# Altium PCB PCB_REG.PcbDoc
Units mil, origin at the board's own origin, x right, y up, seen from the top; angles counter-clockwise.
Board outline 3440 x 3440 mil, 4 copper layers (Top Signal, PWR, GND, Bottom Signal), stack 23.756 mil thick; 57 components, 44 nets, 300 pads, 49 vias.
Unrouted connection lines stored in the file: 28.
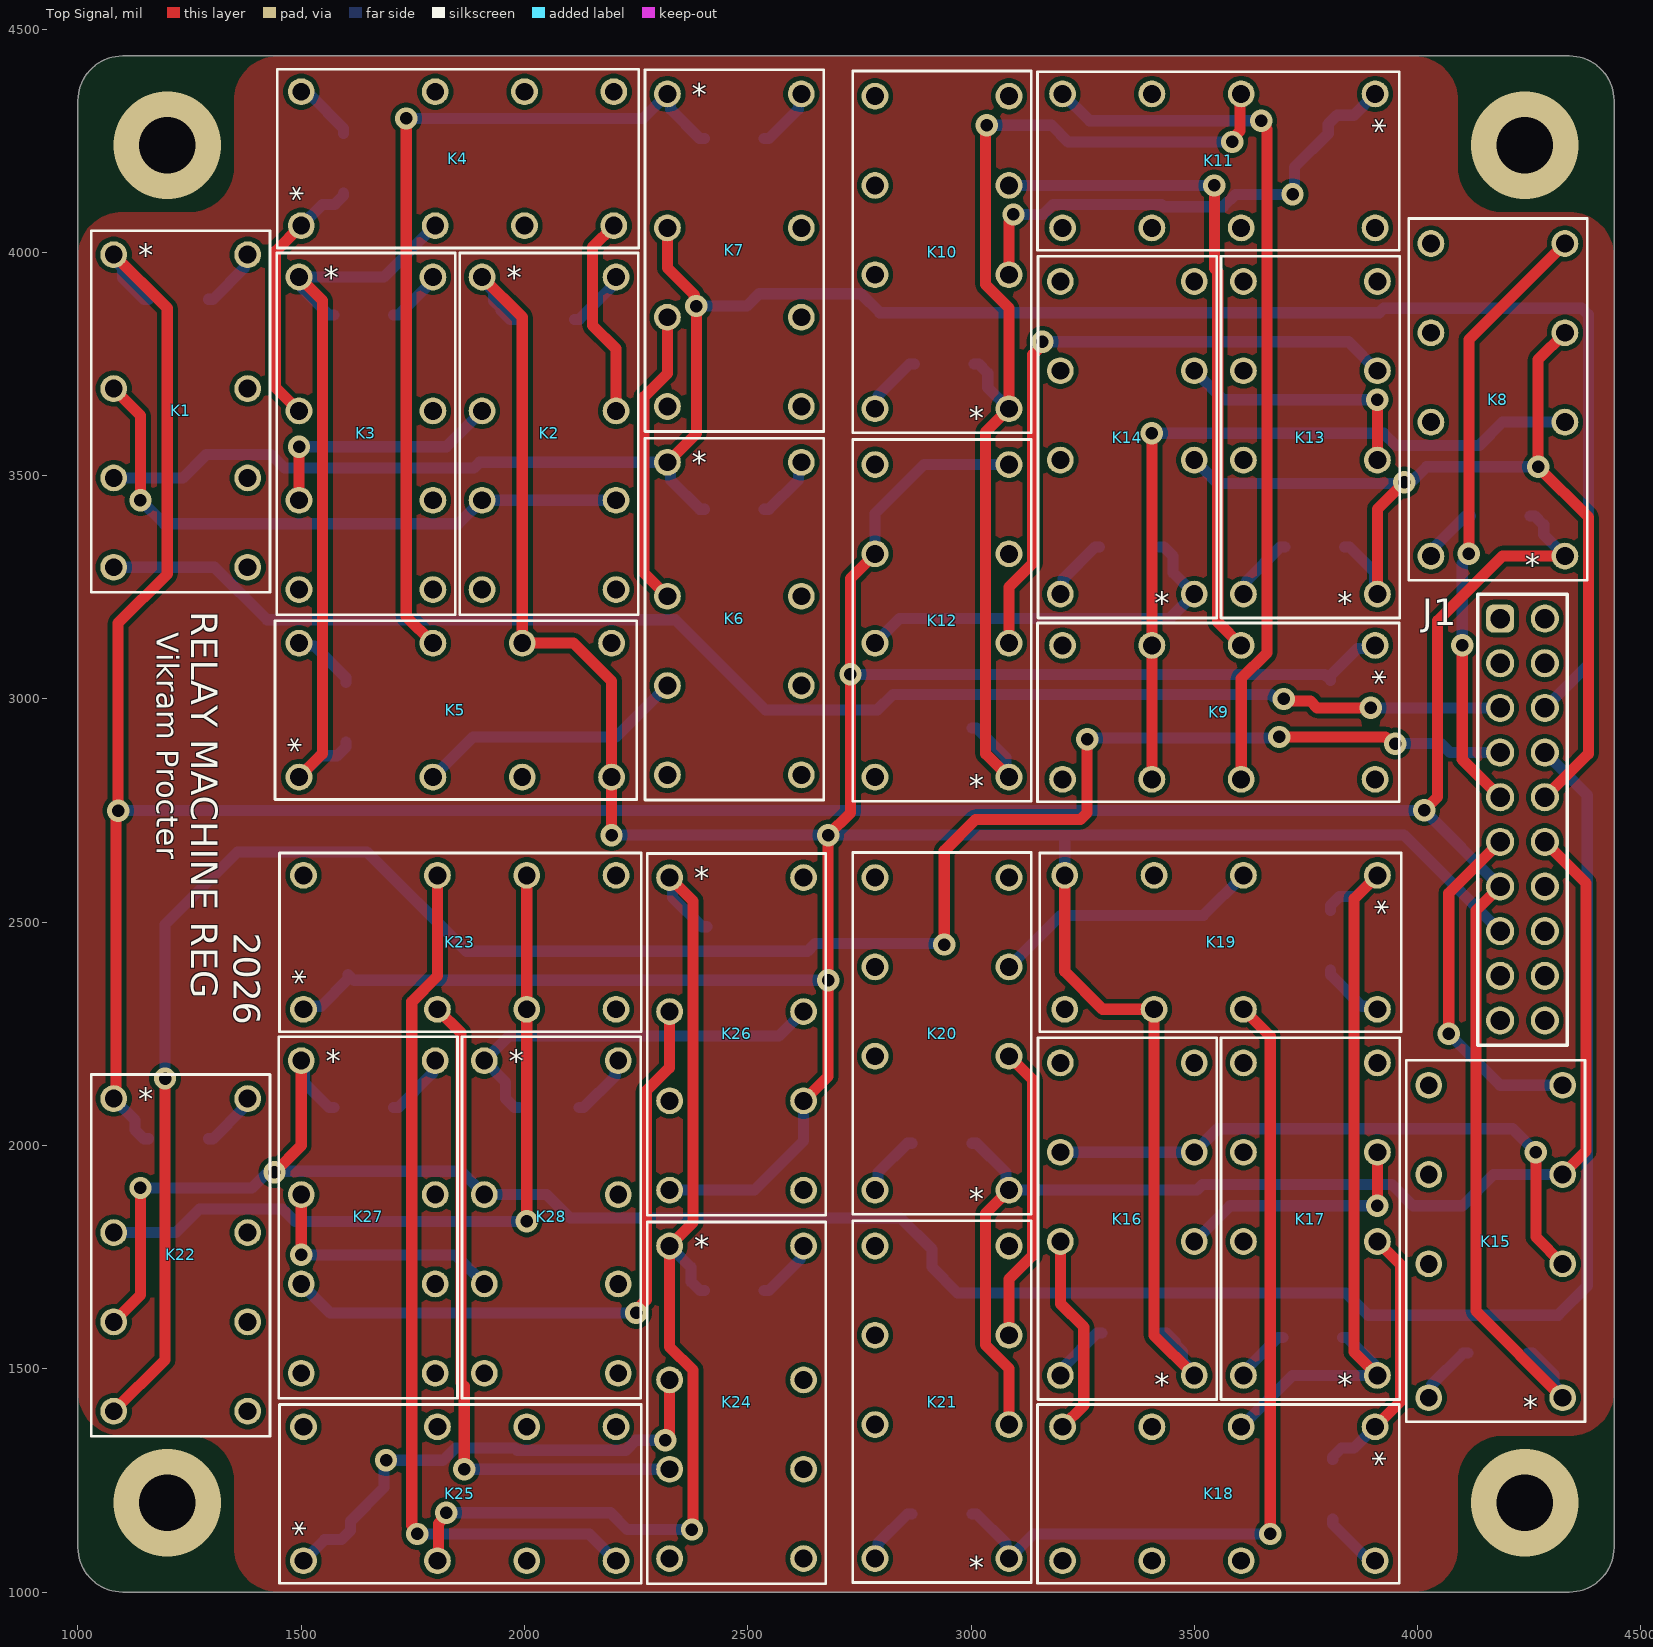
[diagram p0: Top Signal view]
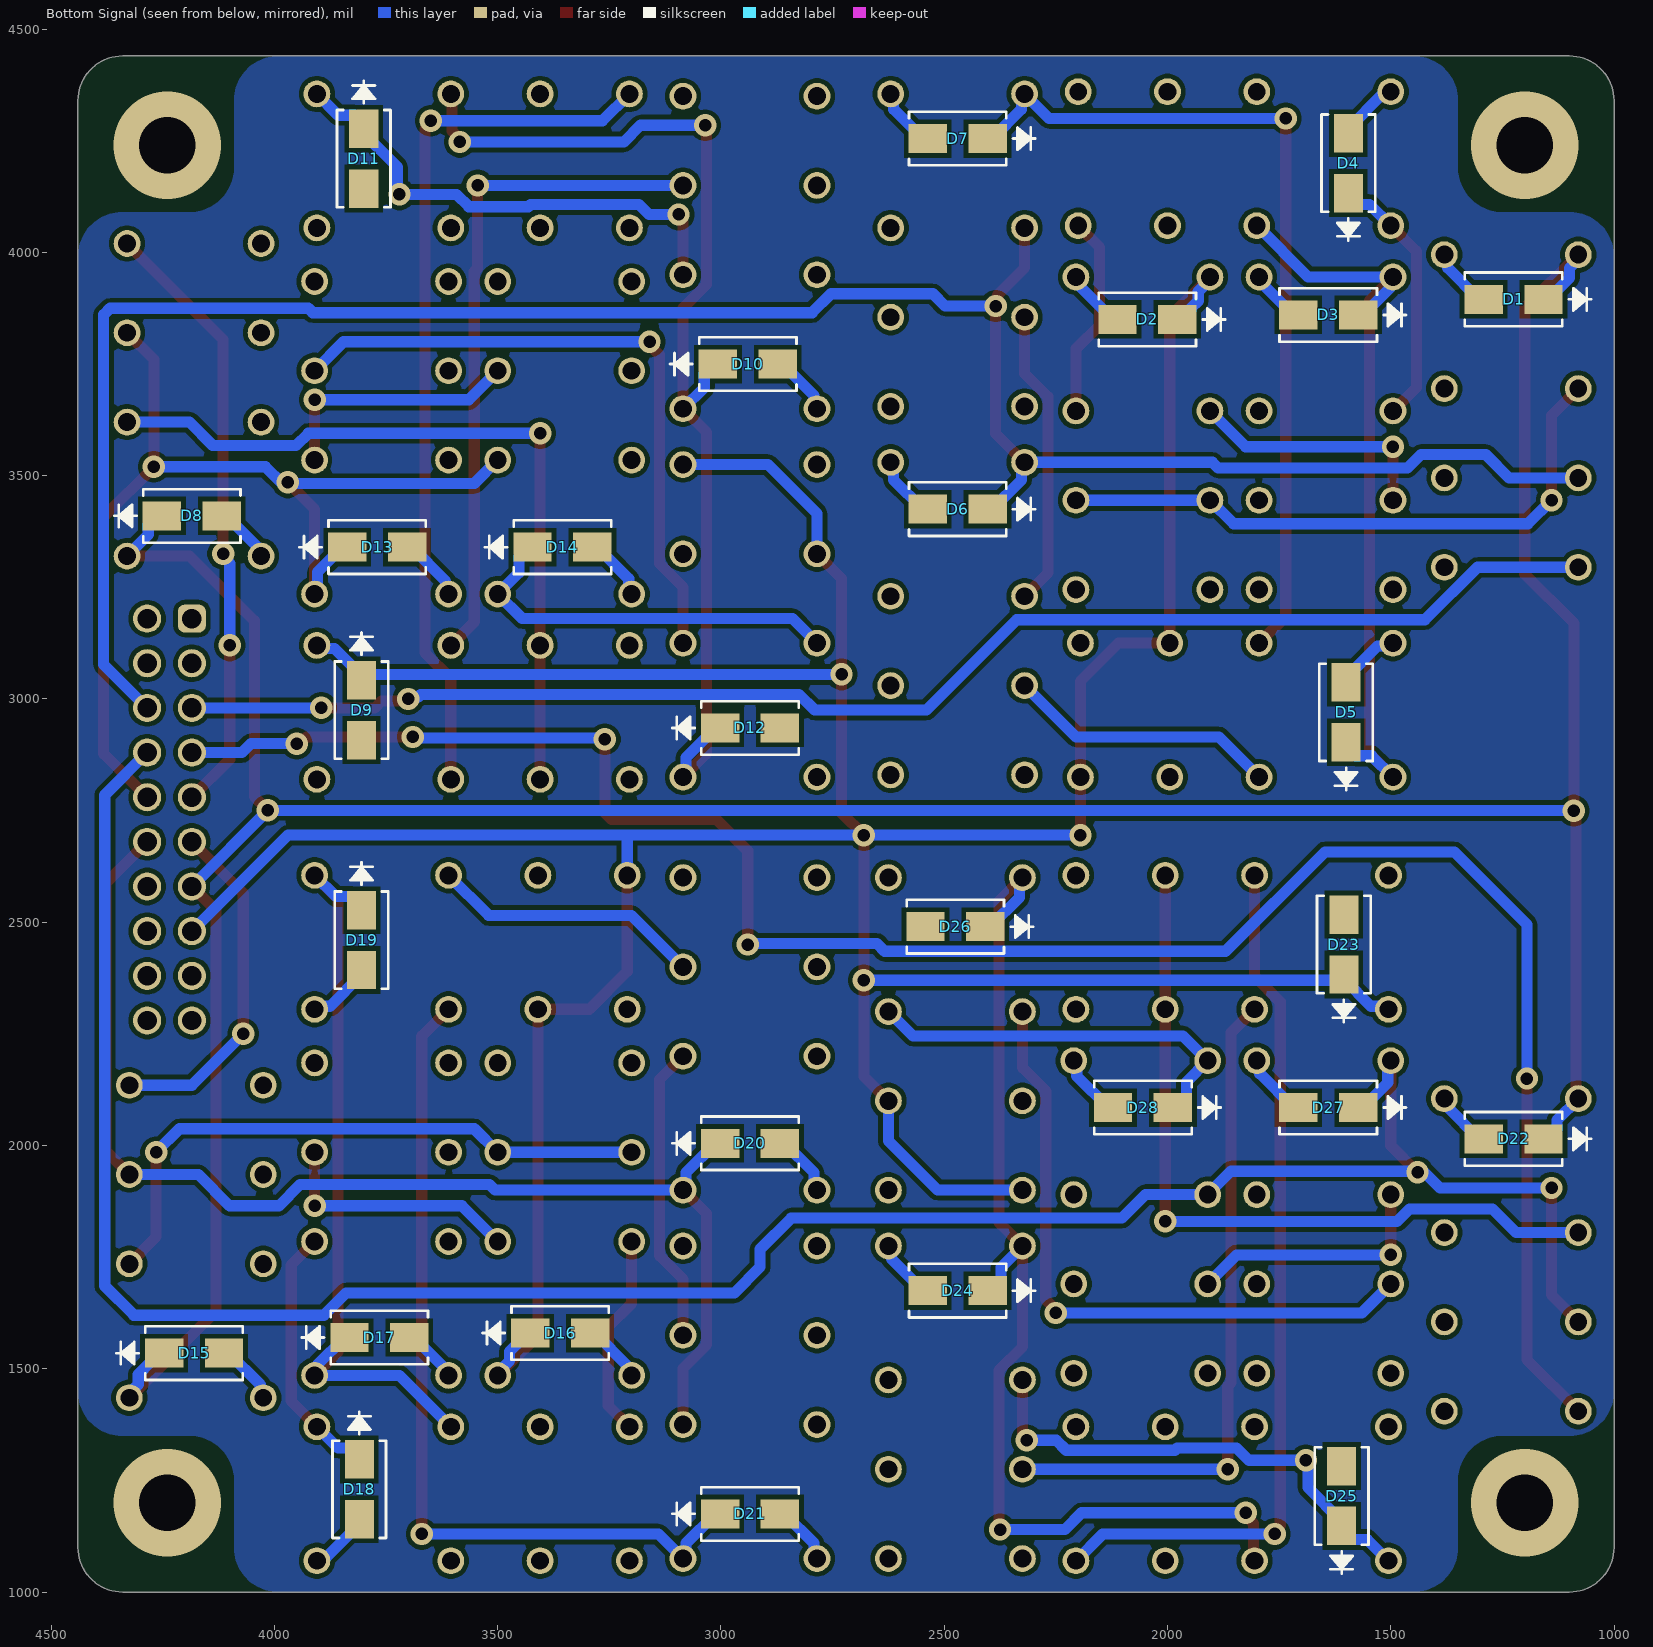
[diagram p1: Bottom Signal view, seen from below]
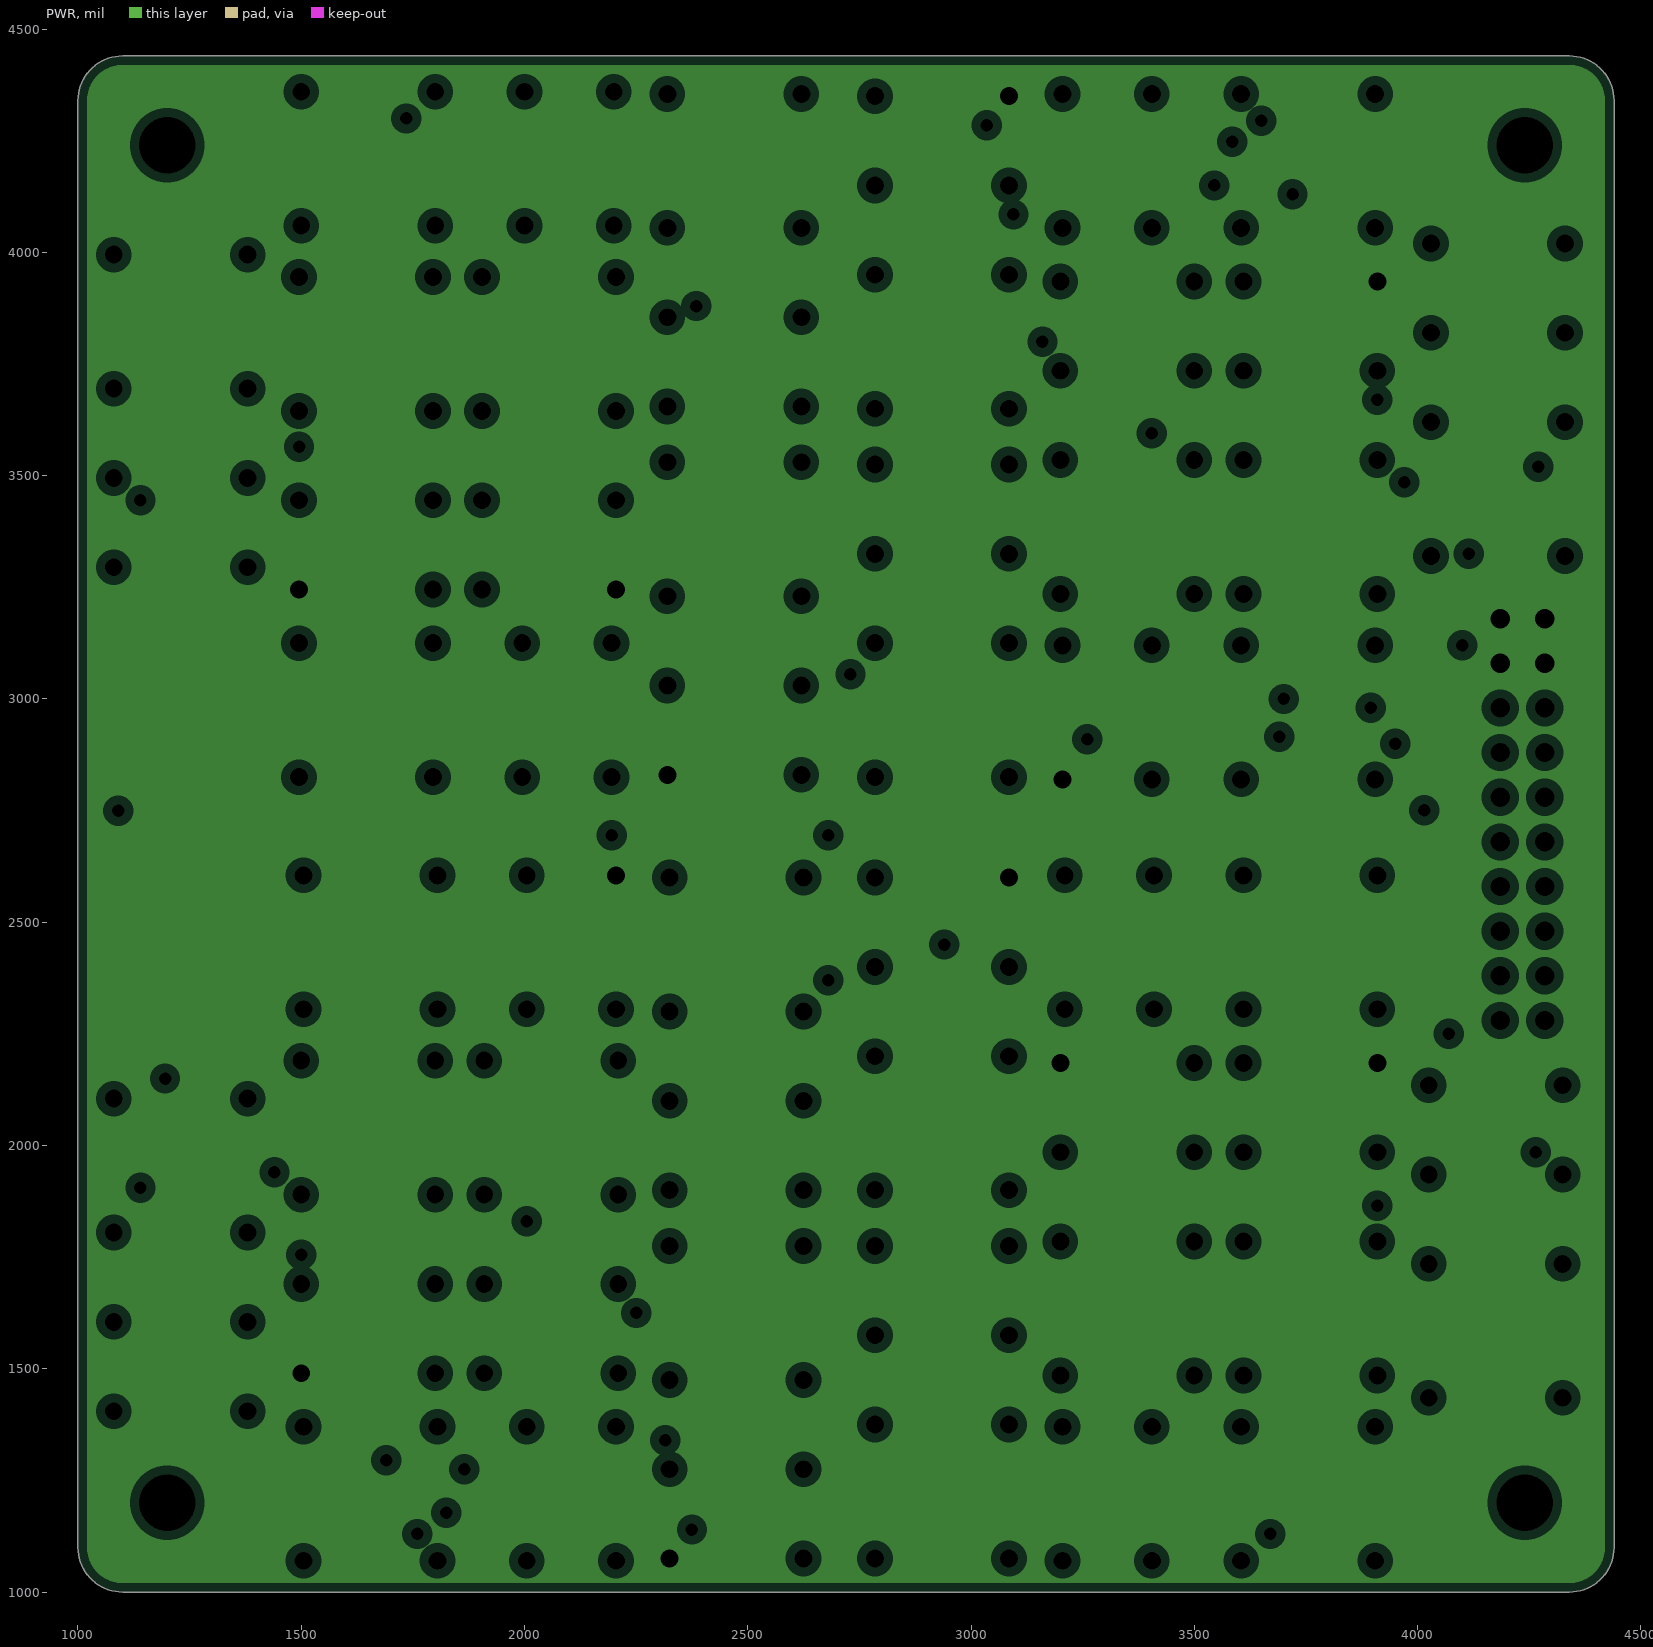
[diagram p2: PWR, clearances drawn from the general rule]
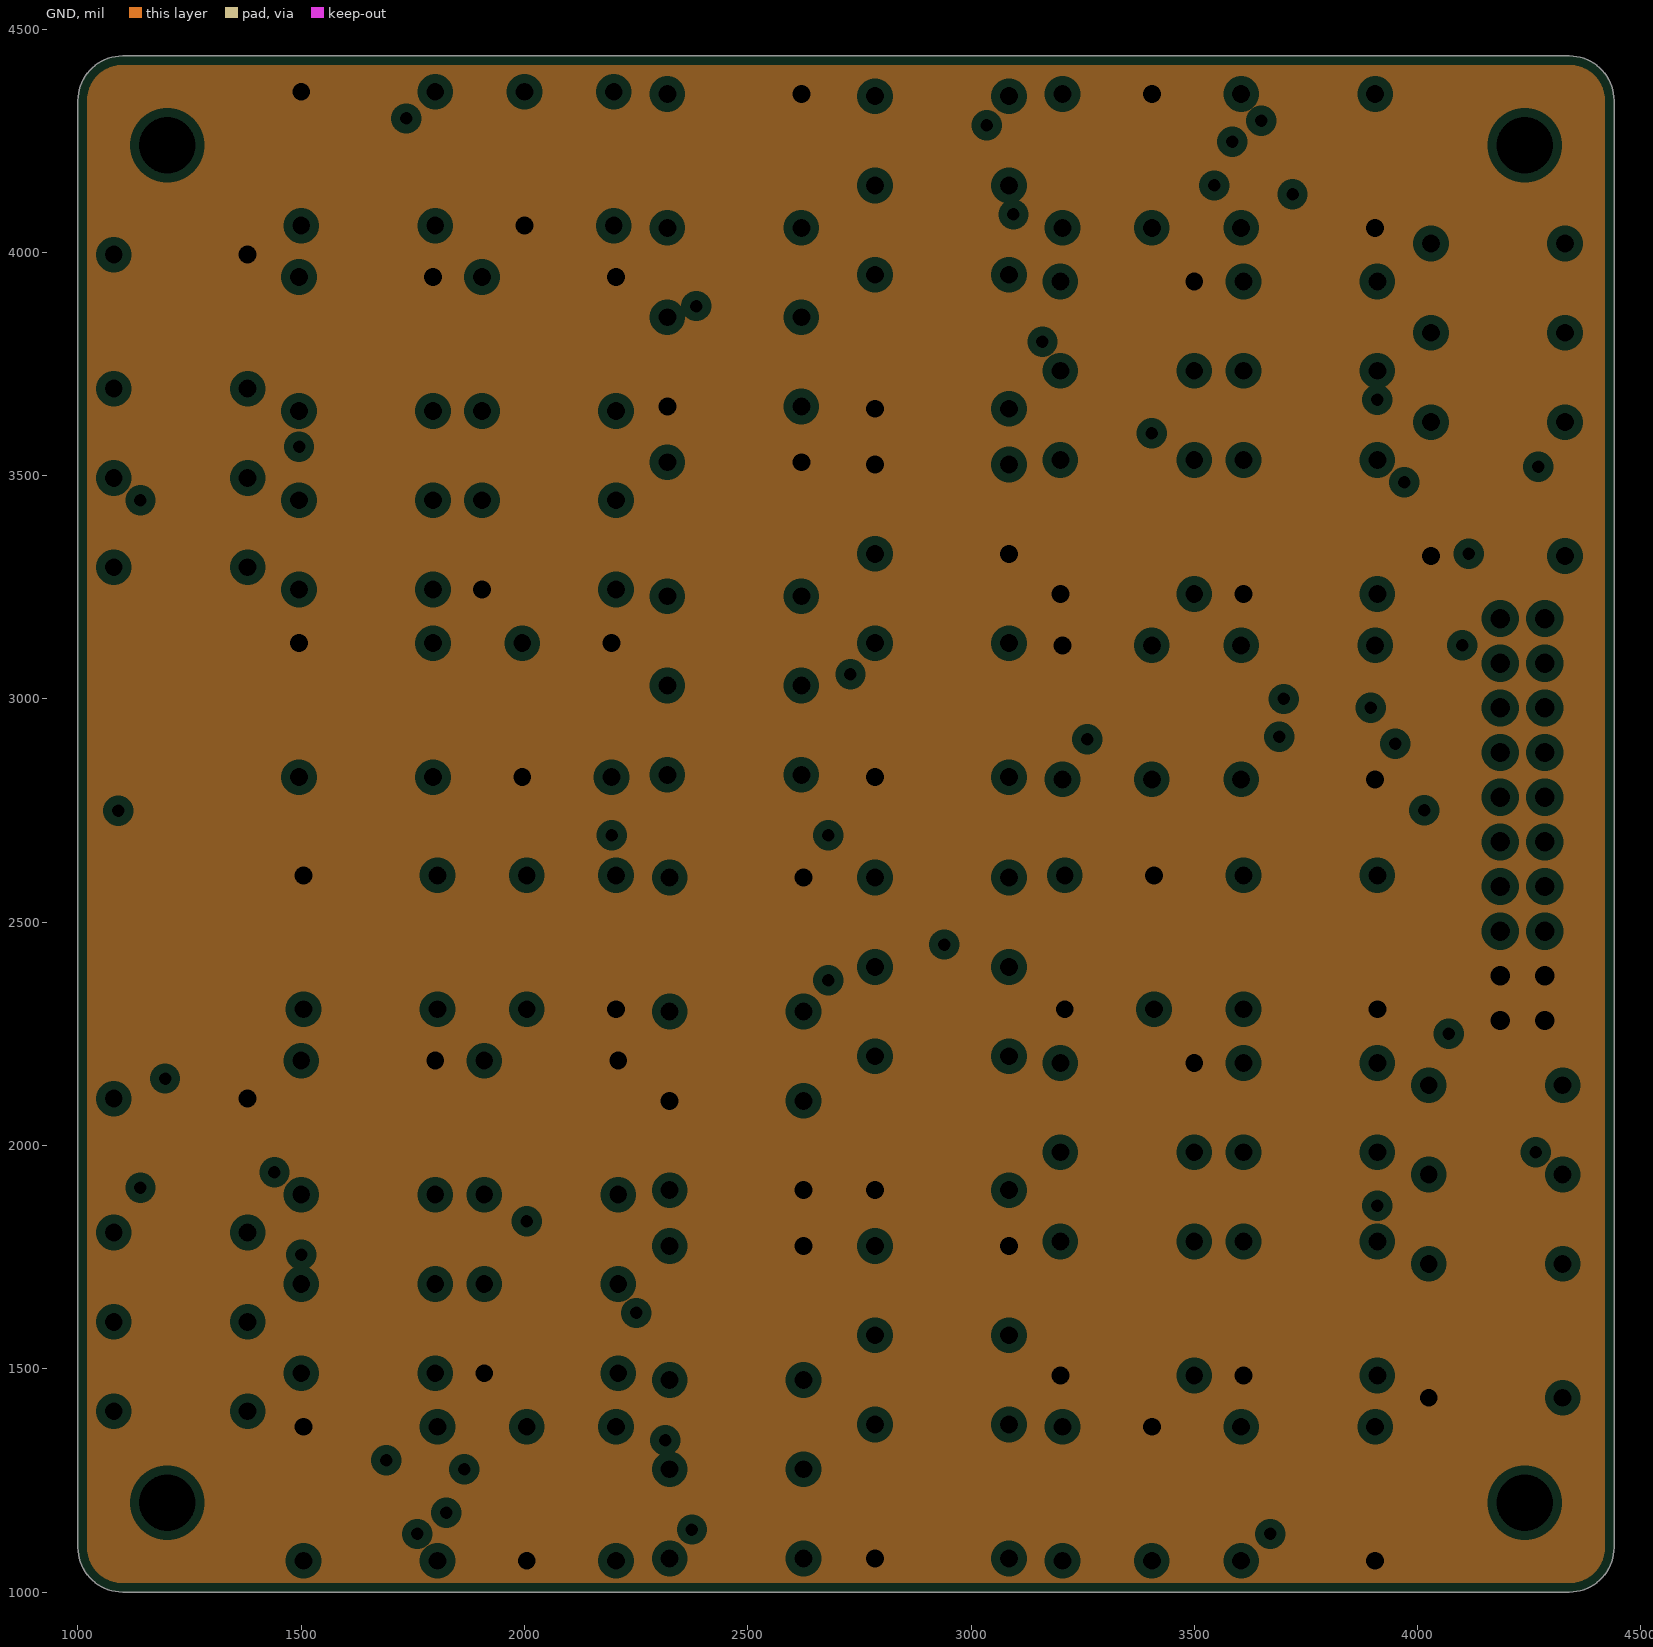
[diagram p3: GND, clearances drawn from the general rule]
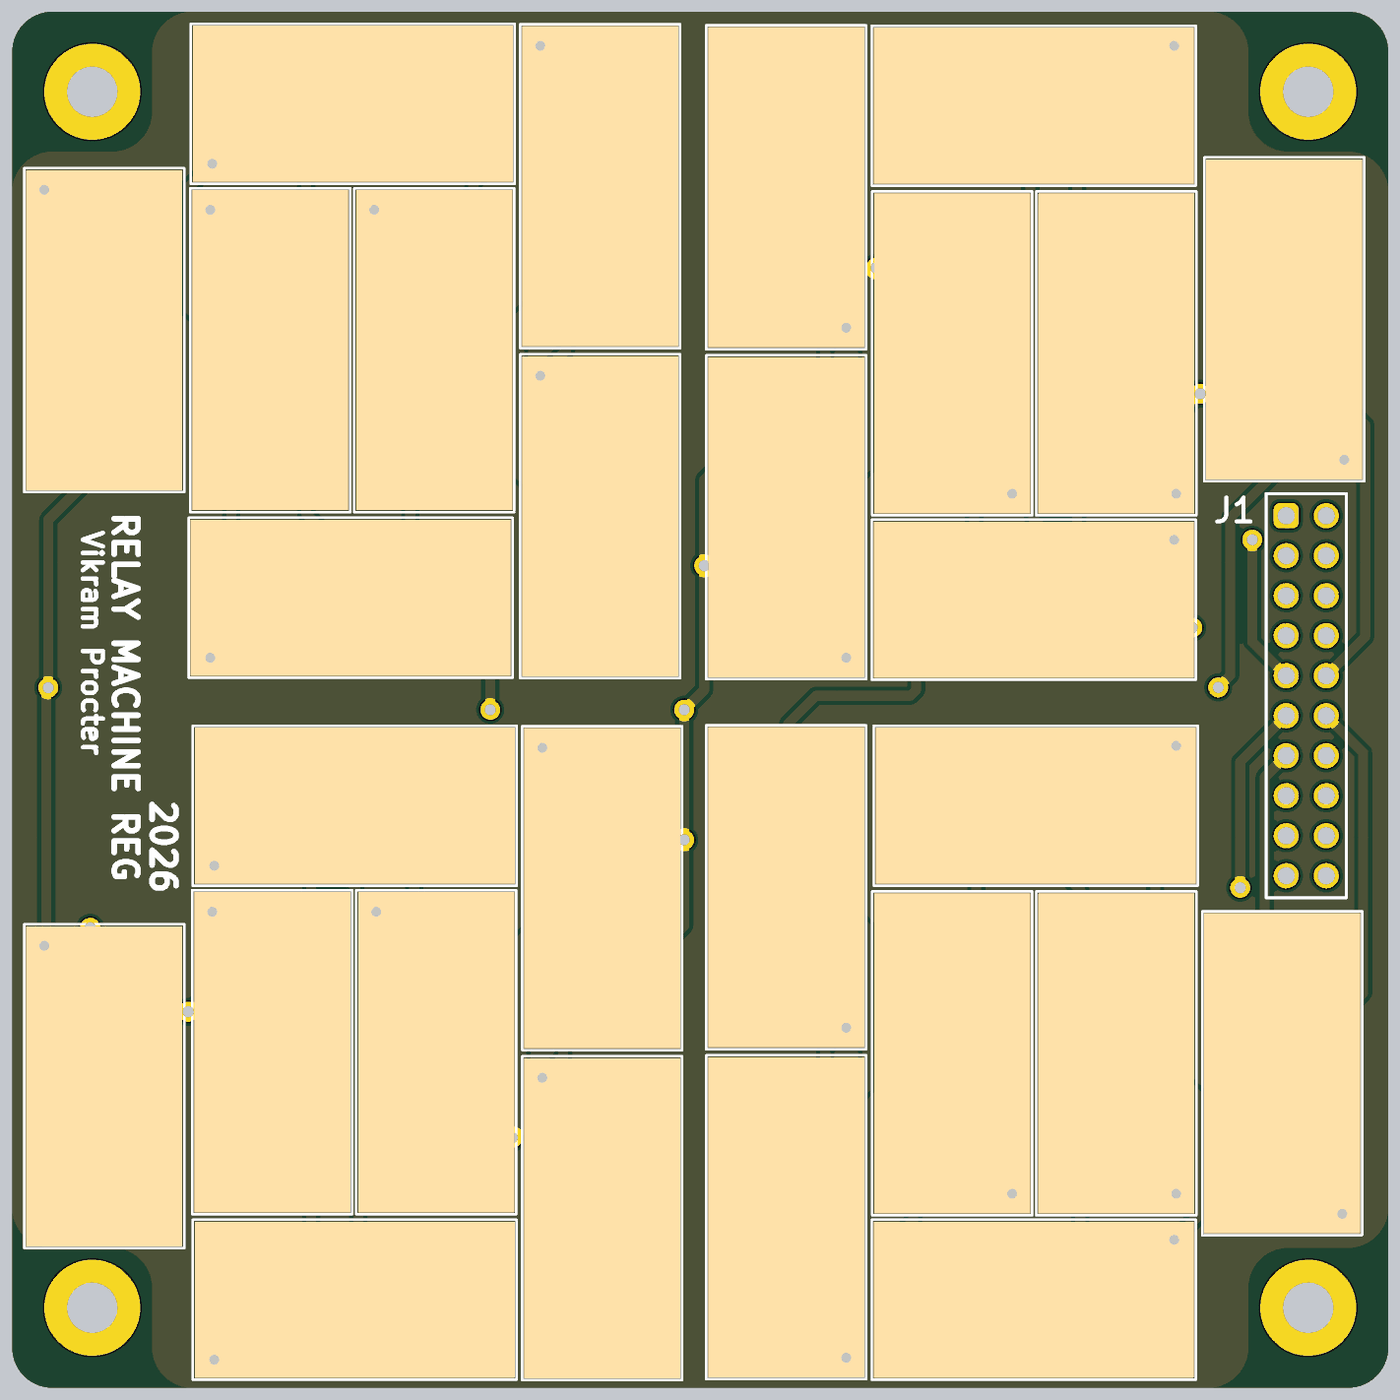
[diagram p4: 3D render of the assembled board from above, using the file's embedded part models]
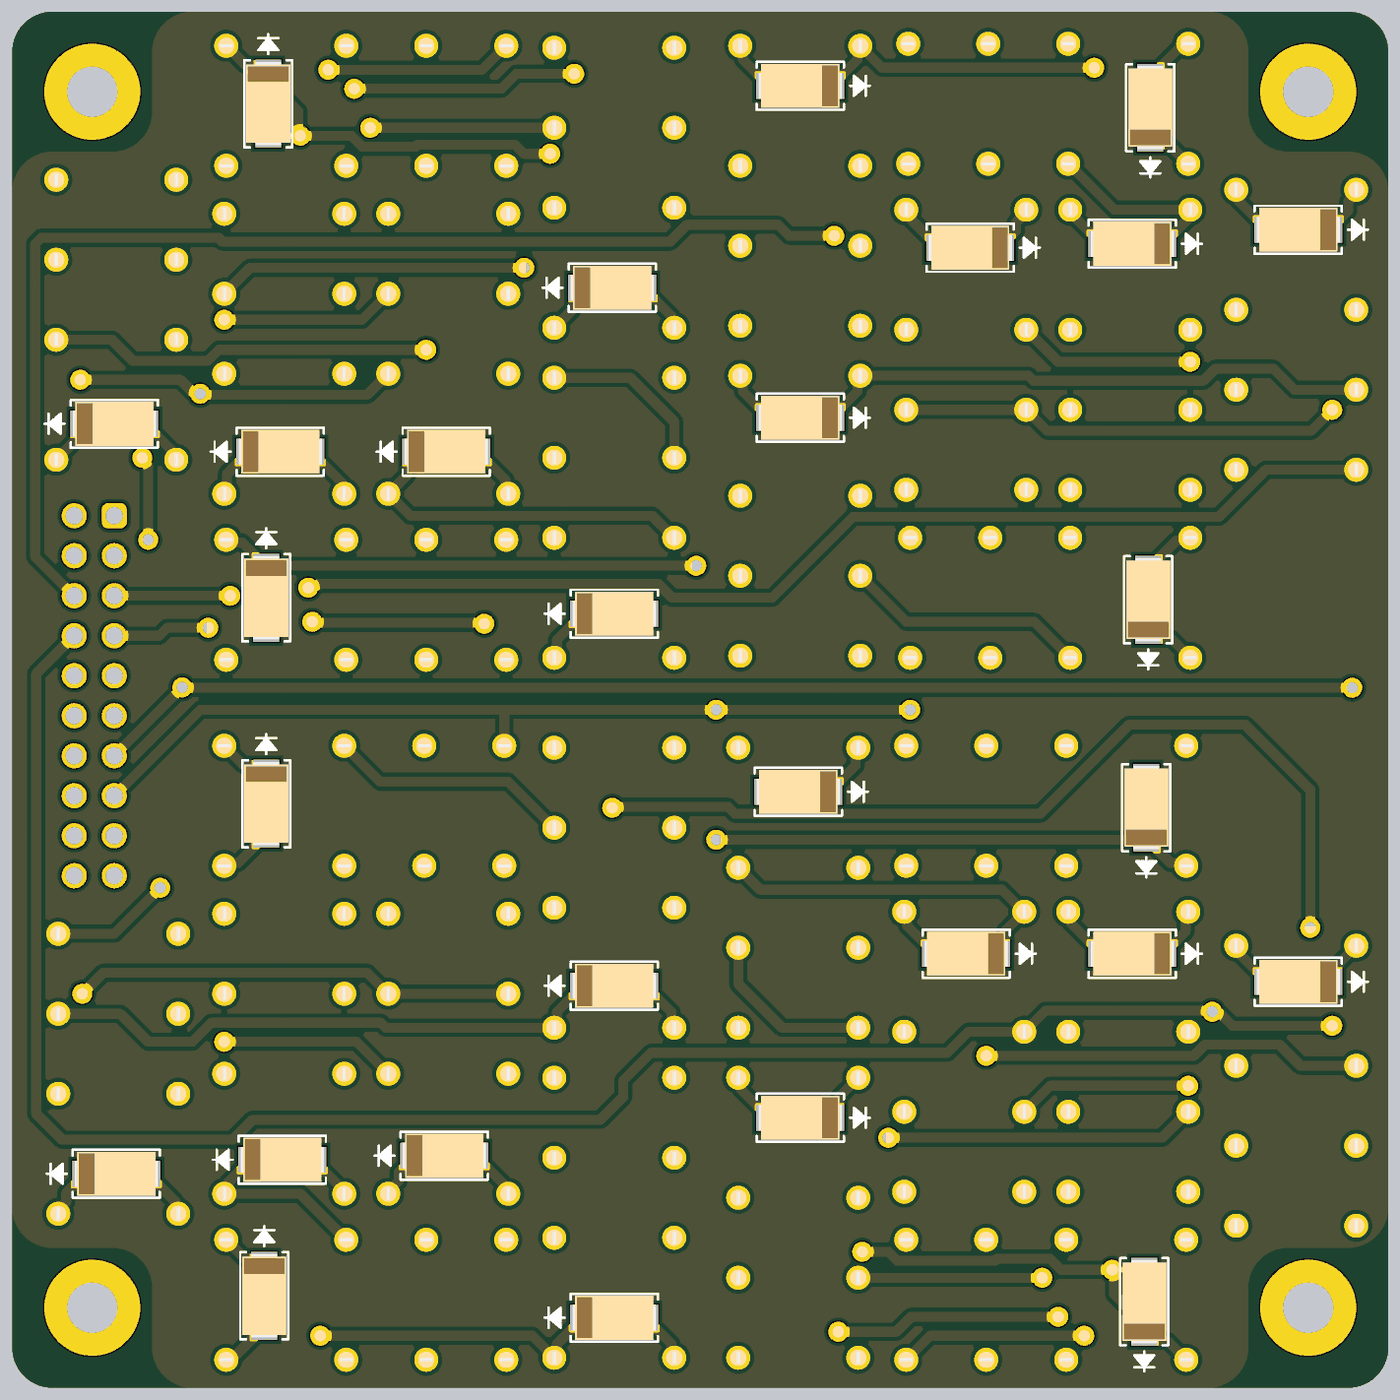
[diagram p5: 3D render of the assembled board from below, using the file's embedded part models]

## Layer stack, top to bottom
Top Solder: solder mask 0.4, Solder Resist, Dk 3.5
Top Signal: signal copper 1.4
Dielectric 2: prepreg 2.8, PP-006, Dk 4.1
PWR: plane copper 1.378, net +24V
Dielectric 1: dielectric 12.6, FR-4, Dk 4.8
GND: plane copper 1.378, net GND
Dielectric 3: prepreg 2.8, PP-006, Dk 4.1
Bottom Signal: signal copper 1.4
Bottom Solder: solder mask 0.4, Solder Resist, Dk 3.5

## Board outline
1000,4340 cw(c1100,4340) 1100,4440 4340,4440 cw(c4340,4340) 4440,4340 4440,1100 cw(c4340,1100) 4340,1000 1100,1000 cw(c1100,1100) 1000,1100 1000,2825

## Design rules (kind name [scope] priority, off if disabled: settings)
Clearance [All] p1: gap=10 ignorepadtopadclearanceinfootprint=FALSE
PlaneClearance [All] p1: clearance=20
PlaneConnect [All] p1: planeconnectstyle=Direct reliefexpansion=20 reliefentries=4 reliefconductorwidth=10 reliefairgap=10
PolygonConnect [All] p1: connectstyle=Direct reliefconductorwidth=10 reliefentries=4 polygonreliefangle="90 Angle" airgapwidth=10
RoomDefinition U_FlipFlop2 [InComponentClass('U_FlipFlop2')] p1: confinementstyle=ConfineIn formatcopy=TRUE lockcomponents=FALSE outline 4395,4425 2715,4425 2715,2750 4395,2750
RoomDefinition U_FlipFlop1 [InComponentClass('U_FlipFlop1')] p2: confinementstyle=ConfineIn formatcopy=TRUE lockcomponents=FALSE outline 1010,2755 2690,2755 2690,4430 1010,4430
RoomDefinition U_FlipFlop3 [InComponentClass('U_FlipFlop3')] p3: confinementstyle=ConfineIn formatcopy=TRUE lockcomponents=FALSE outline 4395,2675 2715,2675 2715,1000 4395,1000
RoomDefinition U_FlipFlop4 [InComponentClass('U_FlipFlop4')] p4: confinementstyle=ConfineIn formatcopy=TRUE lockcomponents=FALSE outline 1015,1000 2695,1000 2695,2675 1015,2675
RoutingVias [All] p1: holewidth=28 width=50 viastyle="Through Hole" minholewidth=28 minwidth=50 maxholewidth=28 maxwidth=50
SolderMaskExpansion [All] p1: expansion=4 istentingtop=FALSE
SupplyNets "Schematic Supply Nets_1" [InNet('GND')] p1: voltage=0.000
SupplyNets "Schematic Supply Nets" [InNet('+24V')] p2: voltage=0.000
Width [All] p1: maxlimit=40 minlimit=10 preferedwidth=25
28 further rules are at their usual default settings.

## Classes and differential pairs
channel class FlipFlop: U_FlipFlop1 U_FlipFlop2 U_FlipFlop3 U_FlipFlop4
component class U_FlipFlop4: D22 D23 D24 D25 D26 D27 D28 K22 K23 K24 K25 K26 K27 K28
component class U_FlipFlop3: D15 D16 D17 D18 D19 D20 D21 K15 K16 K17 K18 K19 K20 K21
component class U_FlipFlop2: D8 D9 D10 D11 D12 D13 D14 K8 K9 K10 K11 K12 K13 K14
component class U_FlipFlop1: D1 D2 D3 D4 D5 D6 D7 K1 K2 K3 K4 K5 K6 K7
component class RAM_top: J1

## Components (designator, comment, footprint, x,y, rotation, side; value= is the part's Value field where it differs from the comment)
D1 "SMAJ24A" "DI SMAJ24A" 1225,3895 r0 bottom value=650pF
D2 "SMAJ24A" "DI SMAJ24A" 2045,3850 r0 bottom value=650pF
D3 "SMAJ24A" "DI SMAJ24A" 1640,3860 r0 bottom value=650pF
D4 "SMAJ24A" "DI SMAJ24A" 1595,4200 r90 bottom value=650pF
D5 "SMAJ24A" "DI SMAJ24A" 1600,2970 r90 bottom value=650pF
D6 "SMAJ24A" "DI SMAJ24A" 2470,3425 r0 bottom value=650pF
D7 "SMAJ24A" "DI SMAJ24A" 2470,4255 r0 bottom value=650pF
D8 "SMAJ24A" "DI SMAJ24A" 4185,3410 r180 bottom value=650pF (schematic designator D1)
D9 "SMAJ24A" "DI SMAJ24A" 3805,2975 r270 bottom value=650pF (schematic designator D2)
D10 "SMAJ24A" "DI SMAJ24A" 2940,3750 r180 bottom value=650pF (schematic designator D3)
D11 "SMAJ24A" "DI SMAJ24A" 3800,4210 r270 bottom value=650pF (schematic designator D4)
D12 "SMAJ24A" "DI SMAJ24A" 2935,2935 r180 bottom value=650pF (schematic designator D5)
D13 "SMAJ24A" "DI SMAJ24A" 3770,3340 r180 bottom value=650pF (schematic designator D6)
D14 "SMAJ24A" "DI SMAJ24A" 3355,3340 r180 bottom value=650pF (schematic designator D7)
D15 "SMAJ24A" "DI SMAJ24A" 4180,1535 r180 bottom value=650pF (schematic designator D1)
D16 "SMAJ24A" "DI SMAJ24A" 3360,1580 r180 bottom value=650pF (schematic designator D2)
D17 "SMAJ24A" "DI SMAJ24A" 3765,1570 r180 bottom value=650pF (schematic designator D3)
D18 "SMAJ24A" "DI SMAJ24A" 3810,1230 r270 bottom value=650pF (schematic designator D4)
D19 "SMAJ24A" "DI SMAJ24A" 3805,2460 r270 bottom value=650pF (schematic designator D5)
D20 "SMAJ24A" "DI SMAJ24A" 2935,2005 r180 bottom value=650pF (schematic designator D6)
D21 "SMAJ24A" "DI SMAJ24A" 2935,1175 r180 bottom value=650pF (schematic designator D7)
D22 "SMAJ24A" "DI SMAJ24A" 1225,2015 r0 bottom value=650pF (schematic designator D1)
D23 "SMAJ24A" "DI SMAJ24A" 1605,2450 r90 bottom value=650pF (schematic designator D2)
D24 "SMAJ24A" "DI SMAJ24A" 2470,1675 r0 bottom value=650pF (schematic designator D3)
D25 "SMAJ24A" "DI SMAJ24A" 1610,1215 r90 bottom value=650pF (schematic designator D4)
D26 "SMAJ24A" "DI SMAJ24A" 2475,2490 r0 bottom value=650pF (schematic designator D5)
D27 "SMAJ24A" "DI SMAJ24A" 1640,2085 r0 bottom value=650pF (schematic designator D6)
D28 "SMAJ24A" "DI SMAJ24A" 2055,2085 r0 bottom value=650pF (schematic designator D7)
J1 "Con 2.54mm 10x2pos" "Con 2.54mm 10x2pos" 4235,2730 r270 top
K1 "J104D2C24VDC.15S" "Relay J104D2C24VDC.15S" 1080,3995 r0 top
K2 "J104D2C24VDC.15S" "Relay J104D2C24VDC.15S" 1905,3945 r0 top
K3 "J104D2C24VDC.15S" "Relay J104D2C24VDC.15S" 1495,3945 r0 top
K4 "J104D2C24VDC.15S" "Relay J104D2C24VDC.15S" 1500,4060 r90 top
K5 "J104D2C24VDC.15S" "Relay J104D2C24VDC.15S" 1495,2825 r90 top
K6 "J104D2C24VDC.15S" "Relay J104D2C24VDC.15S" 2320,3530 r0 top
K7 "J104D2C24VDC.15S" "Relay J104D2C24VDC.15S" 2320,4355 r0 top
K8 "J104D2C24VDC.15S" "Relay J104D2C24VDC.15S" 4330,3320 r180 top (schematic designator K1)
K9 "J104D2C24VDC.15S" "Relay J104D2C24VDC.15S" 3905,3120 r270 top (schematic designator K2)
K10 "J104D2C24VDC.15S" "Relay J104D2C24VDC.15S" 3085,3650 r180 top (schematic designator K3)
K11 "J104D2C24VDC.15S" "Relay J104D2C24VDC.15S" 3905,4355 r270 top (schematic designator K4)
K12 "J104D2C24VDC.15S" "Relay J104D2C24VDC.15S" 3085,2825 r180 top (schematic designator K5)
K13 "J104D2C24VDC.15S" "Relay J104D2C24VDC.15S" 3910,3235 r180 top (schematic designator K6)
K14 "J104D2C24VDC.15S" "Relay J104D2C24VDC.15S" 3500,3235 r180 top (schematic designator K7)
K15 "J104D2C24VDC.15S" "Relay J104D2C24VDC.15S" 4325,1435 r180 top (schematic designator K1)
K16 "J104D2C24VDC.15S" "Relay J104D2C24VDC.15S" 3500,1485 r180 top (schematic designator K2)
K17 "J104D2C24VDC.15S" "Relay J104D2C24VDC.15S" 3910,1485 r180 top (schematic designator K3)
K18 "J104D2C24VDC.15S" "Relay J104D2C24VDC.15S" 3905,1370 r270 top (schematic designator K4)
K19 "J104D2C24VDC.15S" "Relay J104D2C24VDC.15S" 3910,2605 r270 top (schematic designator K5)
K20 "J104D2C24VDC.15S" "Relay J104D2C24VDC.15S" 3085,1900 r180 top (schematic designator K6)
K21 "J104D2C24VDC.15S" "Relay J104D2C24VDC.15S" 3085,1075 r180 top (schematic designator K7)
K22 "J104D2C24VDC.15S" "Relay J104D2C24VDC.15S" 1080,2105 r0 top (schematic designator K1)
K23 "J104D2C24VDC.15S" "Relay J104D2C24VDC.15S" 1505,2305 r90 top (schematic designator K2)
K24 "J104D2C24VDC.15S" "Relay J104D2C24VDC.15S" 2325,1775 r0 top (schematic designator K3)
K25 "J104D2C24VDC.15S" "Relay J104D2C24VDC.15S" 1505,1070 r90 top (schematic designator K4)
K26 "J104D2C24VDC.15S" "Relay J104D2C24VDC.15S" 2325,2600 r0 top (schematic designator K5)
K27 "J104D2C24VDC.15S" "Relay J104D2C24VDC.15S" 1500,2190 r0 top (schematic designator K6)
K28 "J104D2C24VDC.15S" "Relay J104D2C24VDC.15S" 1910,2190 r0 top (schematic designator K7)

## Footprints (in the part's own frame and the unit in brackets; to place one, negate y for a bottom-side part, rotate by r counter-clockwise, add the part's x,y. Pads: shape width x height; smd on the part's side, far side on the other; paste and mask are expansions set on the pad)
"Con 2.54mm 10x2pos" [mm]
  rrect50% 1.6x1.6 hole 1.1: 1(-11.43,-1.27)
  round 1.6 hole 1.1: 2(-11.43,1.27) 3(-8.89,-1.27) 4(-8.89,1.27) 5(-6.35,-1.27) 6(-6.35,1.27) 7(-3.81,-1.27) 8(-3.81,1.27) 9(-1.27,-1.27) 10(-1.27,1.27) 11(1.27,-1.27) 12(1.27,1.27) 13(3.81,-1.27) 14(3.81,1.27) 15(6.35,-1.27) 16(6.35,1.27) 17(8.89,-1.27) 18(8.89,1.27) 19(11.43,-1.27) 20(11.43,1.27)
  silkscreen extent -12.83,-2.54 12.83,2.54
"DI SMAJ24A" [mil]
  rect 86x65 smd paste+0 mask+4: 1(-67,0) 2(67,0)
  silkscreen extent -174,-60 109,60, body extent -104,-55 104,55, height 92
"Relay J104D2C24VDC.15S" [mil]
  round 60 hole 40 paste-99999 mask+0: 1(0,0) 2(0,-300) 3(0,-500) 4(0,-700) 5(300,-700) 6(300,-500) 7(300,-300) 8(300,0)
  silkscreen extent -50,-756 350,54, body extent -45,-751 345,49, height 450

## Part data
D1 D2 D3 D4 D5 D6 D7 D8 D9 D10 D11 D12 D13 D14 D15 D16 D17 D18 D19 D20 D21 D22 D23 D24 D25 D26 D27 D28: library part "DI SMAJ24A", "SMAJ Series 400 W 24 V Uni-Directional Surface Mount TVS Diode - DO-214AC", Breakdown Voltage=28.1V, Case/Package=SMA, Clamping Voltage=38.9V, Forward Voltage=3.5V, Leakage Current=1µA, Manufacturer=Littelfuse, Max Breakdown Voltage=29.5V, Max Junction Temperature (Tj)=150°C, Max Output current=10.3A, Max Power Dissipation=3.3W, Min Breakdown Voltage=26.7V, Min Operating Temperature=-65°C, Operating Supply Voltage=24V, Peak Pulse Power=400W, Power Line Protection=No, Supplier Part Number=SMAJ24ALFCT-ND, Test Current=1mA, Category="TVS Diodes", China RoHS=Non-Compliant, ComponentLink1Description=https://datasheet.octopart.com:443/SMAJ24A-Littelfuse-datasheet-150463581.pdf?src-supplier=Farnell, ComponentLink1URL=https://datasheet.octopart.com:443/SMAJ24A-Littelfuse-datasheet-150463581.pdf?src-supplier=Farnell, ComponentLink2Description=https://datasheet.octopart.com:443/SMAJ24A-Littelfuse-datasheet-63710798.pdf?src-supplier=element14+APAC, ComponentLink2URL=https://datasheet.octopart.com:443/SMAJ24A-Littelfuse-datasheet-63710798.pdf?src-supplier=element14+APAC, ComponentLink3Description=https://datasheet.octopart.com:443/SMAJ24A-Littelfuse-datasheet-11547152.pdf?src-supplier=element14+APAC, ComponentLink3URL=https://datasheet.octopart.com:443/SMAJ24A-Littelfuse-datasheet-11547152.pdf?src-supplier=element14+APAC, ComponentLink4Description=https://datasheet.octopart.com:443/SMAJ24A-Littelfuse-datasheet-5393952.pdf?src-supplier=element14+APAC, ComponentLink4URL=https://datasheet.octopart.com:443/SMAJ24A-Littelfuse-datasheet-5393952.pdf?src-supplier=element14+APAC, ComponentLink5Description=https://datasheet.octopart.com:443/SMAJ24A-Littelfuse-datasheet-511791.pdf?src-supplier=element14+APAC, ComponentLink5URL=https://datasheet.octopart.com:443/SMAJ24A-Littelfuse-datasheet-511791.pdf?src-supplier=element14+APAC, ComponentLink6Description=https://datasheet.octopart.com:443/SMAJ24A-Littelfuse-datasheet-164649624.pdf?src-supplier=JRH+Electronics, ComponentLink6URL=https://datasheet.octopart.com:443/SMAJ24A-Littelfuse-datasheet-164649624.pdf?src-supplier=JRH+Electronics, ComponentLink7Description=https://datasheet.octopart.com:443/SMAJ24A-Littelfuse-datasheet-38878911.pdf?src-supplier=RS+(Formerly+Allied+Electronics), ComponentLink7URL=https://datasheet.octopart.com:443/SMAJ24A-Littelfuse-datasheet-38878911.pdf?src-supplier=RS+(Formerly+Allied+Electronics), ComponentLink8Description=https://datasheet.octopart.com:443/SMAJ24A-Littelfuse-datasheet-17901671.pdf?src-supplier=Future+Electronics, ComponentLink8URL=https://datasheet.octopart.com:443/SMAJ24A-Littelfuse-datasheet-17901671.pdf?src-supplier=Future+Electronics, ComponentLink9Description=https://datasheet.octopart.com:443/SMAJ24A-Littelfuse-datasheet-1053.pdf?src-supplier=DigiKey, ComponentLink9URL=https://datasheet.octopart.com:443/SMAJ24A-Littelfuse-datasheet-1053.pdf?src-supplier=DigiKey, Composition=Zener, Direction=Unidirectional, Element Configuration=Single, Height=2.29mm, Lead Free="Lead Free", Length=4.5mm, Lifecycle Status=Production, Manufacturer Part Number=SMAJ24A, Max Operating Temperature=150°C, Max Reverse Leakage Current=1µA, Max Surge Current=10.3A, Mounting Technology="Surface Mount", Number of Channels=1, Number of Elements=1, Number of Terminals=2, Number of Unidirectional Channels=1, Packaging="Tape & Reel", Peak Pulse Current=10.3A, Peak Reverse Current=1µA, Pins=2, Polarity=Unidirectional, Power Dissipation=400W, Power Rating=400W, Pricing="1=0.21, 10=0.113, 100=0.074, 500=0.072, 1000=0.071 (USD)", Radiation Hardening=No, REACH SVHC=No, Reverse Breakdown Voltage=26.7V, Reverse Standoff Voltage=24V, Reverse Voltage=24V, RoHS=Compliant, Schedule B="8541100080, 8541100080|8541100080|8541100080|8541100080|8541100080", Stock=97583, Supplier=DigiKey, Termination=SMD/SMT, Voltage Rating (DC)=24V, Width=2.79mm
J1: "WR-BHD Straight Male, Box Header, Through Hole, 2 Rows, 20 Contacts, 2.54mm Pitch", Color=Black, Contact Resistance=20mΩ, Current Rating=3A, Flammability Rating="UL94 V-0", Insulation Resistance=1GΩ, Manufacturer="Wurth Elektronik", Manufacturer Part Number=61202021621, Max Operating Temperature=105°C, Min Operating Temperature=-40°C, Operating Supply Voltage=250V, Supplier Part Number=732-2096-ND, Category="Headers and Wire Housings", ComponentLink1Description=https://datasheet.octopart.com:443/61202021621-W%C3%BCrth-Elektronik-datasheet-111087935.pdf?src-supplier=Upverter, ComponentLink1URL=https://datasheet.octopart.com:443/61202021621-W%C3%BCrth-Elektronik-datasheet-111087935.pdf?src-supplier=Upverter, ComponentLink2Description=https://datasheet.octopart.com:443/61202021621-Wurth-Elektronik-datasheet-168480024.pdf?src-supplier=Wurth+Elektronik, ComponentLink2URL=https://datasheet.octopart.com:443/61202021621-Wurth-Elektronik-datasheet-168480024.pdf?src-supplier=Wurth+Elektronik, ComponentLink3Description=https://datasheet.octopart.com:443/61202021621-W%C3%BCrth-Elektronik-datasheet-149523954.pdf?src-supplier=Farnell, ComponentLink3URL=https://datasheet.octopart.com:443/61202021621-W%C3%BCrth-Elektronik-datasheet-149523954.pdf?src-supplier=Farnell, ComponentLink4Description=https://datasheet.octopart.com:443/61202021621-W%C3%BCrth-Elektronik-Midcom-datasheet-10469446.pdf?src-supplier=Farnell, ComponentLink4URL=https://datasheet.octopart.com:443/61202021621-W%C3%BCrth-Elektronik-Midcom-datasheet-10469446.pdf?src-supplier=Farnell, ComponentLink5Description=https://datasheet.octopart.com:443/61202021621-W%C3%BCrth-Elektronik-Midcom-datasheet-5367532.pdf?src-supplier=element14+APAC, ComponentLink5URL=https://datasheet.octopart.com:443/61202021621-W%C3%BCrth-Elektronik-Midcom-datasheet-5367532.pdf?src-supplier=element14+APAC, Connector Type="Male Pin", Contact Gender=Male, Contact Material=Gold, Contact Plating=Gold, Gender=Male, Height=9.25mm, Housing Material=PBT, Insulation=Insulated, Insulation Material=PBT, Lead Pitch=2.54mm, Length=33.06mm, Mounting Technology="Through Hole", Number of Contacts=20, Number of Positions=20, Number of Rows=2, Orientation=Vertical, Pins=20, Pitch=2.54mm, Pricing="1=0.86, 10=0.839, 50=0.7732, 160=0.69213, 320=0.64375 (USD)", RoHS=Compliant, Row Spacing=2.54mm, Stock=12933, Supplier=DigiKey, Termination="Through Hole", Voltage Rating=250V, Voltage Rating (DC)=250V, Width=33.06mm
K1 K2 K3 K4 K5 K6 K7 K8 K9 K10 K11 K12 K13 K14 K15 K16 K17 K18 K19 K20 K21 K22 K23 K24 K25 K26 K27 K28: library part "Relay J104D2C24VDC.15S", "Relay Ul Gen Purp DPDT 2C 24VDC", Coil Current=6mA, Coil Power=150mW, Coil Resistance=3.84kΩ, Coil Voltage (DC)=18V, Contact Current Rating=2A, Contact Resistance=50mΩ, Contact Voltage Rating (AC)=250V, Insulation Resistance=100MΩ, Manufacturer="CIT Relay & Switch", Max Operating Temperature=85°C, Max Voltage Rating (DC)=100V, Min Operating Temperature=-40°C, Supplier Part Number=2449-J104D2C24VDC.15S-ND, Category="Signal Relays", Contact Plating=Gold, Electrical Life=100kcycles, Height=11.42mm, Length=20.37mm, Manufacturer Part Number=J104D2C24VDC.15S, Max Current Rating=2A, Number of Terminals=8, Pricing="1=1.26, 20=1.082, 40=1.045, 60=1.02383, 100=0.998, 260=0.95115, 500=0.92036, 1000=0.88878, 5000=0.8195 (USD)", Release Time=4ms, Response Time=6ms, Stock=5620, Supplier=DigiKey, Throw Configuration=DPDT

## Via types
v1: diameter 50, hole 28, Top Signal to Bottom Signal, 45 vias
v2: diameter 240, hole 126, Top Signal to Bottom Signal, 4 vias

## Nets (pads, with @x,y where several pads share a name; then routed paths per layer and width w, separated by ;. In a path a pad name is that pad's centre, name@x,y a point inside that pad or via, vN(x,y) a via of type N, cw(c..) or ccw(c..) an arc to the next point about the centre after c; other vN are vias at no path point)
+24V: J1.1 J1.2 J1.3 J1.4 K2.5 K3.4 K6.4 K9.5 K10.4 K13.4 K16.5 K17.4 K20.4 K23.5 K24.4 K27.4
CLK: D2.1 D9.1 D16.1 D23.1 J1.15 K2.1 K5.4 K5.6 K9.1 K12.4 K12.6 K16.1 K19.4 K19.6 K23.1 K26.4 K26.6 | length 9776.9
  Top Signal w25: K2.1 1995,3855 K5.6 2110,3125 2195,3040 K5.4 v1(2195,2695) ; K26.6 2680,2155 v1(2680,2370) v1(2680,2695) 2730,2745 v1(2730,3055) 2730,3270 K12.6 ; K19.4 3210,2390 3295,2305 K19.6 3410,1575 K16.1
  Bottom Signal w25: K23.1 1511.7,2311.7 1544.2,2311.7 1605,2372.5 D23.1 1618,2370 v1(2680,2370) ; K2.1 1905,3938.98 1931.12,3912.86 1931.12,3891.61 1947.5,3875.23 1947.5,3870 1967.5,3850 D2.1 ; v1(2195,2695) v1(2680,2695) 3210,2695 ; K26.4 2515,1900 2625,2010 K26.6 ; v1(2730,3055) 3792,3055 D9.1 3805,3052.5 3865.8,3113.3 3898.3,3113.3 K9.1 ; K12.6 2785,3415 2895,3525 K12.4 ; K19.4 3210,2695 ; D16.1 3437.5,1580 3457.5,1560 3457.5,1554.77 3473.88,1538.39 3473.88,1517.14 3500,1491.02 K16.1 ; J1.15 3970,2695 3210,2695
D0: J1.5 K1.4 | length 3264.5
  Top Signal w25: v1(3700,3000) 3704.78,2995.22 3759.78,2995.22 3775,2980 v1(3895,2980)
  Bottom Signal w25: K1.4 1305.75,3295 1423.25,3177.5 2337.5,3177.5 2540,2975 2790,2975 2825,3010 3672.86,3010 3678.07,3004.78 3695.22,3004.78 v1(3700,3000) ; v1(3895,2980) J1.5
D1: J1.7 K22.4 | length 4722.2
  Top Signal w25: K22.4 1195,1520 v1(1195,2150) ; v1(2940,2450) 2940,2660 3010,2730 3245,2730 3260,2745 v1(3260,2910) ; v1(3690,2915) 3928.24,2915 3943.24,2900 v1(3950,2900)
  Bottom Signal w25: v1(1195,2150) 1195,2495 1357.5,2657.5 1647.5,2657.5 1870,2435 2633.32,2435 2650.81,2452.5 2937.5,2452.5 v1(2940,2450) ; v1(3260,2910) 3262.5,2912.5 3687.5,2912.5 v1(3690,2915) ; v1(3950,2900) 4052.5,2900 4072.5,2880 J1.7
D2: J1.9 K8.4 | length 1370.5
  Top Signal w25: v1(4100,3120) 4100,2865 J1.9 ; v1(4115,3325) 4115,3805 K8.4
  Bottom Signal w25: v1(4100,3120) 4100,3303.24 4115,3318.24 v1(4115,3325)
D3: J1.11 K15.4 | length 780.3
  Top Signal w25: v1(4070,2250) 4070,2565 J1.11
  Bottom Signal w25: v1(4070,2250) 4185,2135 K15.4
D_U_FlipFlop1: K1.2 K2.3 K2.6 | length 1383.3
  Top Signal w25: K1.2 1140,3635 v1(1140,3445)
  Bottom Signal w25: v1(1140,3445) 1192.5,3392.5 1852.5,3392.5 K2.3 K2.6
D_U_FlipFlop2: K8.2 K9.3 K9.6 | length 1733.1
  Top Signal w25: K9.6 K9.3 v1(3405,3595)
  Bottom Signal w25: v1(3405,3595) 3924.25,3595 3951.75,3567.5 4138.14,3567.5 4190.64,3620 K8.2
D_U_FlipFlop3: K15.2 K16.3 K16.6 | length 1383.3
  Top Signal w25: v1(4265,1985) 4265,1795 K15.2
  Bottom Signal w25: K16.6 K16.3 3552.5,2037.5 4212.5,2037.5 v1(4265,1985)
D_U_FlipFlop4: K22.2 K23.3 K23.6 | length 1733.1
  Top Signal w25: v1(2005,1830) K23.3 K23.6
  Bottom Signal w25: K22.2 1219.36,1805 1271.86,1857.5 1458.25,1857.5 1485.75,1830 v1(2005,1830)
GND: D1.2 D2.2 D3.2 D4.2 D5.2 D6.2 D7.2 D8.2 D9.2 D10.2 D11.2 D12.2 D13.2 D14.2 D15.2 D16.2 D17.2 D18.2 D19.2 D20.2 D21.2 D22.2 D23.2 D24.2 D25.2 D26.2 D27.2 D28.2 J1.17 J1.18 J1.19 J1.20 K1.8 K2.4 K2.8 K3.8 K4.3 K4.8 K5.3 K5.5 K5.8 K6.8 K7.4 K7.8 K8.8 K9.4 K9.8 K10.8 K11.3 K11.8 K12.3 K12.5 K12.8 K13.8 K14.4 K14.8 K15.8 K16.4 K16.8 K17.8 K18.3 K18.8 K19.3 K19.5 K19.8 K20.8 K21.4 K21.8 K22.8 K23.4 K23.8 K24.8 K25.3 K25.8 K26.3 K26.5 K26.8 K27.8 K28.4 K28.8 | length 3111.4
  Bottom Signal w25: D22.2 1302.5,2015 1373.3,2085.8 1373.3,2098.3 K22.8 ; D1.2 1302.5,3895 1373.3,3965.8 1373.3,3988.3 K1.8 ; K5.8 1501.7,3118.3 1529.2,3118.3 1600,3047.5 D5.2 ; K4.8 1506.7,4353.3 1519.2,4353.3 1595,4277.5 D4.2 ; D27.2 1717.5,2085 1793.3,2160.8 1793.3,2183.3 K27.8 ; D3.2 1717.5,3860 1795,3937.5 K3.8 ; D2.2 2122.5,3850 2198.3,3925.8 2198.3,3938.3 K2.8 ; D28.2 2132.5,2085 2203.3,2155.8 2203.3,2183.3 K28.8 ; D24.2 2547.5,1675 2618.3,1745.8 2618.3,1768.3 K24.8 ; D6.2 2547.5,3425 2613.3,3490.8 2613.3,3523.3 K6.8 ; D7.2 2547.5,4255 2613.3,4320.8 2613.3,4348.3 K7.8 ; K21.8 2791.7,1081.69 2791.7,1109.2 2857.5,1175 D21.2 ; K20.8 2791.7,1906.7 2791.7,1939.2 2857.5,2005 D20.2 ; K10.8 2791.7,3656.7 2791.7,3679.2 2862.5,3750 D10.2 ; K16.8 3206.7,1491.7 3206.7,1504.2 3282.5,1580 D16.2 ; K14.8 3206.7,3241.7 3206.7,3269.2 3277.5,3340 D14.2 ; K17.8 3610,1492.5 3687.5,1570 D17.2 ; K13.8 3616.7,3241.7 3616.7,3264.2 3692.5,3340 D13.2 ; D19.2 3805,2382.5 3875.8,2311.7 3903.3,2311.7 K19.8 ; D18.2 3810,1152.5 3885.8,1076.7 3898.3,1076.7 K18.8 ; K15.8 4031.7,1441.7 4031.7,1464.2 4102.5,1535 D15.2 ; K8.8 4036.7,3326.7 4036.7,3339.2 4107.5,3410 D8.2
L1_AndTop_U_FlipFlop1: K2.2 K3.3 | length 563.1
  Top Signal w25: K3.3 v1(1495,3565)
  Bottom Signal w25: v1(1495,3565) 1825,3565 K2.2
L1_AndTop_U_FlipFlop2: K9.2 K10.3 | length 1514.9
  Top Signal w25: v1(3545,4150) 3545,3964.25 3552.5,3956.75 3552.5,3172.5 K9.2
  Bottom Signal w25: K10.3 v1(3545,4150)
L1_AndTop_U_FlipFlop3: K16.2 K17.3 | length 563.1
  Top Signal w25: v1(3910,1865) K17.3
  Bottom Signal w25: K16.2 3580,1865 v1(3910,1865)
L1_AndTop_U_FlipFlop4: K23.2 K24.3 | length 1514.9
  Top Signal w25: K23.2 1857.5,2252.5 1857.5,1468.25 1865,1460.75 v1(1865,1275)
  Bottom Signal w25: v1(1865,1275) K24.3
L1_OrBot_U_FlipFlop1: K2.7 K4.4 | length 456.4
  Top Signal w25: K4.4 2200,4059.54 2152.5,4012.04 2152.5,3836.86 2205,3784.36 K2.7
L1_OrBot_U_FlipFlop2: K9.7 K11.4 | length 1973.8
  Top Signal w25: K9.7 3605,3045.75 3662.5,3103.25 3662.5,4275.74 3650,4288.24 v1(3650,4295)
  Bottom Signal w25: K11.4 3265,4295 v1(3650,4295)
L1_OrBot_U_FlipFlop3: K16.7 K18.4 | length 456.4
  Top Signal w25: K16.7 3200,1645.64 3252.5,1593.14 3252.5,1417.96 3205,1370.46 K18.4
L1_OrBot_U_FlipFlop4: K23.7 K25.4 | length 1973.8
  Top Signal w25: v1(1760,1130) 1760,1136.76 1747.5,1149.26 1747.5,2321.75 1805,2379.25 K23.7
  Bottom Signal w25: v1(1760,1130) 2145,1130 K25.4
L1_SRBack_U_FlipFlop1: D3.1 D5.1 K3.1 K4.2 K5.1 | length 1782.9
  Top Signal w25: K5.1 1547.5,2877.5 1547.5,3892.5 K3.1
  Bottom Signal w25: K5.1 1542.73,2872.73 1580,2872.73 1600,2892.73 D5.1 ; D3.1 1562.5,3860 1501.7,3920.8 1501.7,3938.3 K3.1 1685,3945 K4.2
L1_SRBack_U_FlipFlop2: D10.1 D12.1 K10.1 K11.2 K12.1 | length 2496.4
  Top Signal w25: v1(3035,4285) 3032.5,4282.5 3032.5,3928.25 3085,3875.75 K10.1 3032.5,3597.5 3032.5,2877.5 K12.1 ; v1(3585,4247.5) 3585,4254.26 3602.5,4271.76 3602.5,4352.5 K11.2
  Bottom Signal w25: D12.1 3012.5,2935 3078.3,2869.2 3078.3,2831.7 K12.1 ; D10.1 3017.27,3750 3037.27,3730 3037.27,3697.73 K10.1 ; v1(3035,4285) 3180,4285 3217.5,4247.5 v1(3585,4247.5)
L1_SRBack_U_FlipFlop3: D17.1 D19.1 K17.1 K18.2 K19.1 | length 1782.9
  Top Signal w25: K17.1 3857.5,1537.5 3857.5,2552.5 K19.1
  Bottom Signal w25: K18.2 3720,1485 K17.1 3903.3,1491.7 3903.3,1509.2 3842.5,1570 D17.1 ; D19.1 3805,2537.27 3825,2557.27 3862.27,2557.27 K19.1
L1_SRBack_U_FlipFlop4: D24.1 D26.1 K24.1 K25.2 K26.1 | length 2496.4
  Top Signal w25: K25.2 1807.5,1072.5 1807.5,1153.24 1825,1170.74 v1(1825,1177.5) ; K26.1 2377.5,2547.5 2377.5,1827.5 K24.1 2325,1549.25 2377.5,1496.75 2377.5,1142.5 v1(2375,1140)
  Bottom Signal w25: v1(1825,1177.5) 2192.5,1177.5 2230,1140 v1(2375,1140) ; K24.1 2372.73,1727.27 2372.73,1695 2392.73,1675 D24.1 ; K26.1 2331.7,2593.3 2331.7,2555.8 2397.5,2490 D26.1
L1_SROR_U_FlipFlop1: D4.1 K3.2 K4.1 | length 588.9
  Top Signal w25: K3.2 1442.5,3697.5 1442.5,4002.5 K4.1
  Bottom Signal w25: K4.1 1547.73,4107.73 1575,4107.73 1595,4127.73 D4.1
L1_SROR_U_FlipFlop2: D11.1 K10.2 K11.1 | length 1110.4
  Top Signal w25: K10.2 3085,4068.24 3095,4078.24 v1(3095,4085)
  Bottom Signal w25: v1(3095,4085) 3160.75,4085 3183.25,4107.5 3426.75,4107.5 3431.75,4102.5 3564.68,4102.5 3592.18,4130 v1(3720,4130) 3724.78,4134.78 3724.78,4191.28 3800,4266.5 D11.1 3800,4287.27 3820,4307.27 3857.27,4307.27 K11.1
L1_SROR_U_FlipFlop3: D18.1 K17.2 K18.1 | length 588.9
  Top Signal w25: K18.1 3962.5,1427.5 3962.5,1732.5 K17.2
  Bottom Signal w25: D18.1 3810,1302.27 3830,1322.27 3857.27,1322.27 K18.1
L1_SROR_U_FlipFlop4: D25.1 K24.2 K25.1 | length 1110.4
  Top Signal w25: v1(2315,1340) 2315,1346.76 2325,1356.76 K24.2
  Bottom Signal w25: K25.1 1552.73,1117.73 1590,1117.73 1610,1137.73 D25.1 1610,1158.5 1685.22,1233.72 1685.22,1290.22 v1(1690,1295) 1817.82,1295 1845.32,1322.5 1978.25,1322.5 1983.25,1317.5 2226.75,1317.5 2249.25,1340 v1(2315,1340)
L2_AndBot_U_FlipFlop1: D7.1 K5.7 K7.1 | length 1948.2
  Top Signal w25: v1(1735,4300) 1735,3185 K5.7
  Bottom Signal w25: v1(1735,4300) 2265,4300 K7.1 2326.7,4348.3 2326.7,4320.8 2392.5,4255 D7.1
L2_AndBot_U_FlipFlop2: D14.1 K12.7 K14.1 | length 903.9
  Bottom Signal w25: K12.7 2840,3180 3445,3180 K14.1 3452.27,3282.73 3452.27,3320 3432.27,3340 D14.1
L2_AndBot_U_FlipFlop3: D21.1 K19.7 K21.1 | length 1948.2
  Top Signal w25: K19.7 3670,2245 v1(3670,1130)
  Bottom Signal w25: D21.1 3012.5,1175 3078.3,1109.2 3078.3,1081.7 K21.1 3140,1130 v1(3670,1130)
L2_AndBot_U_FlipFlop4: D28.1 K26.7 K28.1 | length 903.9
  Bottom Signal w25: D28.1 1977.73,2085 1957.73,2105 1957.73,2142.27 K28.1 1965,2245 2570,2245 K26.7
L2_AndTop_U_FlipFlop1: K5.2 K6.3 | length 609.9
  Bottom Signal w25: K5.2 1885,2915 2205,2915 K6.3
L2_AndTop_U_FlipFlop2: K12.2 K13.3 | length 1483
  Top Signal w25: K12.2 3085,3250.75 3137.5,3303.25 3137.5,3770.74 3160,3793.24 v1(3160,3800)
  Bottom Signal w25: v1(3160,3800) 3845,3800 K13.3
L2_AndTop_U_FlipFlop3: K19.2 K20.3 | length 609.9
  Bottom Signal w25: K20.3 3200,2515 3520,2515 K19.2
L2_AndTop_U_FlipFlop4: K26.2 K27.3 | length 1483
  Top Signal w25: v1(2250,1625) 2250,1631.76 2272.5,1654.26 2272.5,2121.75 2325,2174.25 K26.2
  Bottom Signal w25: K27.3 1565,1625 v1(2250,1625)
L2_SRBack_U_FlipFlop1: D6.1 J1.6 K1.3 K6.1 K7.2 | length 4961.2
  Top Signal w25: K6.1 2385,3595 v1(2385,3880) 2380.22,3884.78 2380.22,3904.78 2320,3965 K7.2
  Bottom Signal w25: K1.3 1234.74,3495 1287.24,3547.5 1432.5,3547.5 1462.5,3517.5 1886.68,3517.5 1899.18,3530 K6.1 2326.7,3523.3 2326.7,3490.8 2392.5,3425 D6.1 ; v1(2385,3880) 2498.01,3880 2525.51,3907.5 2753.25,3907.5 2795.75,3865 3914.25,3865 3924.25,3875 4367.86,3875 4382.5,3860.36 4382.5,3077.5 J1.6
L2_SRBack_U_FlipFlop2: D13.1 J1.10 K8.3 K13.1 K14.2 | length 2375.4
  Top Signal w25: K13.1 3910,3425 v1(3970,3485) ; J1.10 4382.5,2877.5 4382.5,3407.5 v1(4270,3520) 4270,3760 K8.3
  Bottom Signal w25: K14.2 3552.5,3482.5 3982.5,3482.5 4020,3520 v1(4270,3520) ; D13.1 3847.5,3340 3903.3,3284.2 3903.3,3241.7 K13.1
L2_SRBack_U_FlipFlop3: D20.1 J1.12 K15.3 K20.1 K21.2 | length 2812.9
  Top Signal w25: K21.2 3085,1500.75 3032.5,1553.25 3032.5,1847.5 K20.1 ; J1.12 4377.5,2587.5 4377.5,1987.5 K15.3
  Bottom Signal w25: D20.1 3012.5,2005 3078.3,1939.2 3078.3,1906.7 K20.1 3505.82,1900 3518.32,1912.5 3942.5,1912.5 3990,1865 4100.26,1865 4170.26,1935 K15.3
L2_SRBack_U_FlipFlop4: D27.1 J1.8 K22.3 K27.1 K28.2 | length 5414.9
  Top Signal w25: K22.3 1140,1665 v1(1140,1905) ; v1(1440,1940) 1500,2000 K27.1
  Bottom Signal w25: v1(1140,1905) 1390,1905 1427.5,1942.5 1857.5,1942.5 K28.2 2049.36,1890 2101.86,1837.5 2842.5,1837.5 2912.39,1767.61 2912.39,1727.61 2970,1670 3839.32,1670 3889.32,1620 4315,1620 4380,1685 4380,2785 J1.8 ; K27.1 1506.7,2183.3 1506.7,2140.8 1562.5,2085 D27.1
L2_SROR_U_FlipFlop1: K6.2 K7.3 | length 668.5
  Top Signal w25: K6.2 2267.5,3282.5 2267.5,3676.75 2320,3729.25 K7.3
L2_SROR_U_FlipFlop2: K13.2 K14.3 | length 571.9
  Top Signal w25: K13.2 v1(3910,3670)
  Bottom Signal w25: K14.3 3565,3670 v1(3910,3670)
L2_SROR_U_FlipFlop3: K20.2 K21.3 | length 668.5
  Top Signal w25: K21.3 3085,1700.75 3137.5,1753.25 3137.5,2147.5 K20.2
L2_SROR_U_FlipFlop4: K27.2 K28.3 | length 571.9
  Top Signal w25: v1(1500,1755) K27.2
  Bottom Signal w25: v1(1500,1755) 1845,1755 K28.3
LD: D1.1 D8.1 D15.1 D22.1 J1.13 K1.1 K8.1 K15.1 K22.1 | length 7718
  Top Signal w25: K22.1 1085.22,2110.21 1085.22,2745.22 v1(1090,2750) 1090,3170 1200,3280 1200,3875 K1.1 ; v1(4015,2750.87) 4045,2780.87 4045,3175 4190,3320 K8.1 ; J1.13 4131,2526 4131,1628.99 K15.1
  Bottom Signal w25: K22.1 1080,2104.54 1127.5,2057.04 1127.5,2035 1147.5,2015 D22.1 ; K1.1 1080,3985.53 1100,3965.53 1100,3942.73 1127.5,3915.23 1127.5,3915 1147.5,3895 D1.1 ; v1(1090,2750) 4015,2750 J1.13 ; D15.1 4257.5,1535 4277.5,1515 4277.5,1514.77 4305,1487.27 4305,1464.47 4325,1444.47 K15.1 ; D8.1 4262.5,3410 4282.5,3390 4282.5,3367.96 4330,3320.46 K8.1
pads on no net: J1.14 J1.16 K1.5 K1.6 K1.7 K3.5 K3.6 K3.7 K4.5 K4.6 K4.7 K6.5 K6.6 K6.7 K7.5 K7.6 K7.7 K8.5 K8.6 K8.7 K10.5 K10.6 K10.7 K11.5 K11.6 K11.7 K13.5 K13.6 K13.7 K14.5 K14.6 K14.7 K15.5 K15.6 K15.7 K17.5 K17.6 K17.7 K18.5 K18.6 K18.7 K20.5 K20.6 K20.7 K21.5 K21.6 K21.7 K22.5 K22.6 K22.7 K24.5 K24.6 K24.7 K25.5 K25.6 K25.7 K27.5 K27.6 K27.7 K28.5 K28.6 K28.7
copper on no net:
  other v2: 1200,1200 4240,1200 1200,4240 4240,4240

## Polygon pours and split planes (outlines as drawn)
no net on Bottom Signal "NONET_L04_P000" (solid, pour order 0): 1000,3990 cw(c1100,3990) 1100,4090 1250,4090 ccw(c1250,4190) 1350,4190 1350,4340 cw(c1450,4340) 1450,4440 3990,4440 cw(c3990,4340) 4090,4340 4090,4190 ccw(c4190,4190) 4190,4090 4340,4090 cw(c4340,3990) 4440,3990 4440,1450 cw(c4340,1450) 4340,1350 4190,1350 ccw(c4190,1250) 4090,1250 4090,1100 cw(c3990,1100) 3990,1000 1450,1000 cw(c1450,1100) 1350,1100 1350,1250 ccw(c1250,1250) 1250,1350 1100,1350 cw(c1100,1450) 1000,1450 1000,2725
no net on Top Signal "NONET_L01_P001" (solid, pour order 1): 1000,3990 cw(c1100,3990) 1100,4090 1250,4090 ccw(c1250,4190) 1350,4190 1350,4340 cw(c1450,4340) 1450,4440 3990,4440 cw(c3990,4340) 4090,4340 4090,4190 ccw(c4190,4190) 4190,4090 4340,4090 cw(c4340,3990) 4440,3990 4440,1450 cw(c4340,1450) 4340,1350 4190,1350 ccw(c4190,1250) 4090,1250 4090,1100 cw(c3990,1100) 3990,1000 1450,1000 cw(c1450,1100) 1350,1100 1350,1250 ccw(c1250,1250) 1250,1350 1100,1350 cw(c1100,1450) 1000,1450 1000,2725
+24V on PWR (split plane): 4347.84,4419.61 4355.61,4418.46 4363.22,4416.55 4370.61,4413.91 4377.71,4410.55 4384.44,4406.51 4390.75,4401.84 4396.57,4396.57 4401.84,4390.75 4406.51,4384.44 4410.55,4377.71 4413.91,4370.61 4416.55,4363.22 4418.46,4355.61 4419.61,4347.84 4419.97,4340.63 4419.9,4340 4419.9,1100 4419.97,1099.37 4419.61,1092.16 4418.46,1084.39 4416.55,1076.78 4413.91,1069.39 4410.55,1062.29 4406.51,1055.56 4401.84,1049.25 4396.57,1043.43 4390.75,1038.16 4384.44,1033.49 4377.71,1029.45 4370.61,1026.09 4363.22,1023.45 4355.61,1021.54 4347.84,1020.39 4340.63,1020.03 4340,1020.1 1100,1020.1 1099.37,1020.03 1092.16,1020.39 1084.39,1021.54 1076.78,1023.45 1069.39,1026.09 1062.29,1029.45 1055.56,1033.49 1049.25,1038.16 1043.43,1043.43 1038.16,1049.25 1033.49,1055.56 1029.45,1062.29 1026.09,1069.39 1023.45,1076.78 1021.54,1084.39 1020.39,1092.16 1020.03,1099.37 1020.1,1100 1020.1,2825 1020.1,4340 1020.03,4340.63 1020.39,4347.84 1021.54,4355.61 1023.45,4363.22 1026.09,4370.61 1029.45,4377.71 1033.49,4384.44 1038.16,4390.75 1043.43,4396.57 1049.25,4401.84 1055.56,4406.51 1062.29,4410.55 1069.39,4413.91 1076.78,4416.55 1084.39,4418.46 1092.16,4419.61 1099.37,4419.97 1100,4419.9 4340,4419.9 4340.63,4419.97
GND on GND (split plane): 4347.84,4419.61 4355.61,4418.46 4363.22,4416.55 4370.61,4413.91 4377.71,4410.55 4384.44,4406.51 4390.75,4401.84 4396.57,4396.57 4401.84,4390.75 4406.51,4384.44 4410.55,4377.71 4413.91,4370.61 4416.55,4363.22 4418.46,4355.61 4419.61,4347.84 4419.97,4340.63 4419.9,4340 4419.9,1100 4419.97,1099.37 4419.61,1092.16 4418.46,1084.39 4416.55,1076.78 4413.91,1069.39 4410.55,1062.29 4406.51,1055.56 4401.84,1049.25 4396.57,1043.43 4390.75,1038.16 4384.44,1033.49 4377.71,1029.45 4370.61,1026.09 4363.22,1023.45 4355.61,1021.54 4347.84,1020.39 4340.63,1020.03 4340,1020.1 1100,1020.1 1099.37,1020.03 1092.16,1020.39 1084.39,1021.54 1076.78,1023.45 1069.39,1026.09 1062.29,1029.45 1055.56,1033.49 1049.25,1038.16 1043.43,1043.43 1038.16,1049.25 1033.49,1055.56 1029.45,1062.29 1026.09,1069.39 1023.45,1076.78 1021.54,1084.39 1020.39,1092.16 1020.03,1099.37 1020.1,1100 1020.1,2825 1020.1,4340 1020.03,4340.63 1020.39,4347.84 1021.54,4355.61 1023.45,4363.22 1026.09,4370.61 1029.45,4377.71 1033.49,4384.44 1038.16,4390.75 1043.43,4396.57 1049.25,4401.84 1055.56,4406.51 1062.29,4410.55 1069.39,4413.91 1076.78,4416.55 1084.39,4418.46 1092.16,4419.61 1099.37,4419.97 1100,4419.9 4340,4419.9 4340.63,4419.97

## Silkscreen, mask and mechanical layers (free items; w line width, h text height)
Top Overlay:
  text "RELAY MACHINE REG" at 1254,3196 h60 r270
  text "Vikram Procter" at 1176,3149 h50 r270
  text "2026" at 1349,2476 h60 r270

## Text inside footprints (layer, text, board x,y; h text height)
K1: Top Overlay "*" at 1135,3970 h50
K2: Top Overlay "*" at 1960,3920 h50
K3: Top Overlay "*" at 1550,3920 h50
K4: Top Overlay "*" at 1525,4115 h50 r90
K5: Top Overlay "*" at 1520,2880 h50 r90
K6: Top Overlay "*" at 2375,3505 h50
K7: Top Overlay "*" at 2375,4330 h50
K8: Top Overlay "*" at 4275,3345 h50 r180
K9: Top Overlay "*" at 3880,3065 h50 r270
K10: Top Overlay "*" at 3030,3675 h50 r180
K11: Top Overlay "*" at 3880,4300 h50 r270
K12: Top Overlay "*" at 3030,2850 h50 r180
K13: Top Overlay "*" at 3855,3260 h50 r180
K14: Top Overlay "*" at 3445,3260 h50 r180
K15: Top Overlay "*" at 4270,1460 h50 r180
K16: Top Overlay "*" at 3445,1510 h50 r180
K17: Top Overlay "*" at 3855,1510 h50 r180
K18: Top Overlay "*" at 3880,1315 h50 r270
K19: Top Overlay "*" at 3885,2550 h50 r270
K20: Top Overlay "*" at 3030,1925 h50 r180
K21: Top Overlay "*" at 3030,1100 h50 r180
K22: Top Overlay "*" at 1135,2080 h50
K23: Top Overlay "*" at 1530,2360 h50 r90
K24: Top Overlay "*" at 2380,1750 h50
K25: Top Overlay "*" at 1530,1125 h50 r90
K26: Top Overlay "*" at 2380,2575 h50
K27: Top Overlay "*" at 1555,2165 h50
K28: Top Overlay "*" at 1965,2165 h50